# Altium PCB CZ100_Weld_V1.0.PcbDoc
Units mm, origin at the board's own origin, x right, y up, seen from the top; angles counter-clockwise.
Board outline 41.8 x 54 mm, 2 copper layers (Top Layer, Bottom Layer); 35 components, 22 nets, 86 pads, 0 vias.
Unrouted connection lines stored in the file: 58.
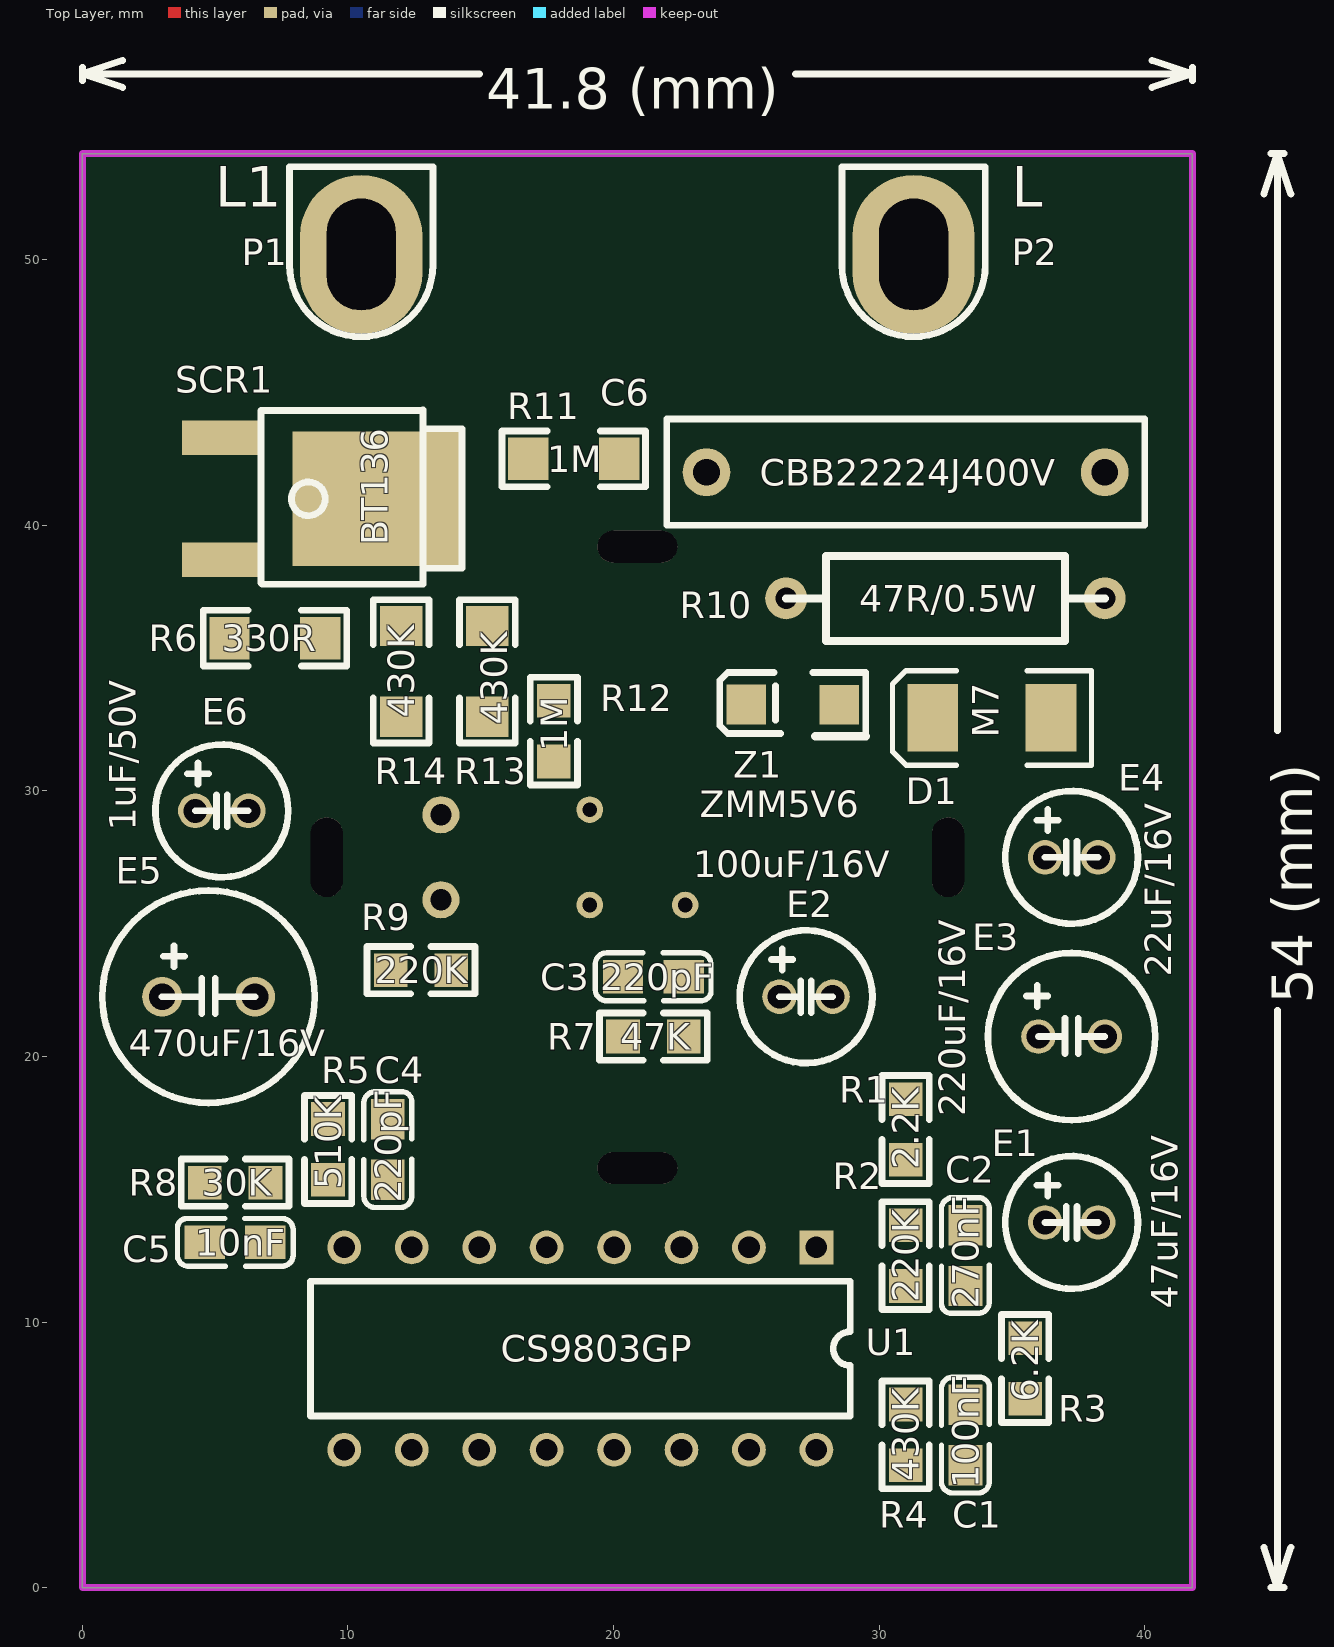
[diagram p0: Top Layer view]
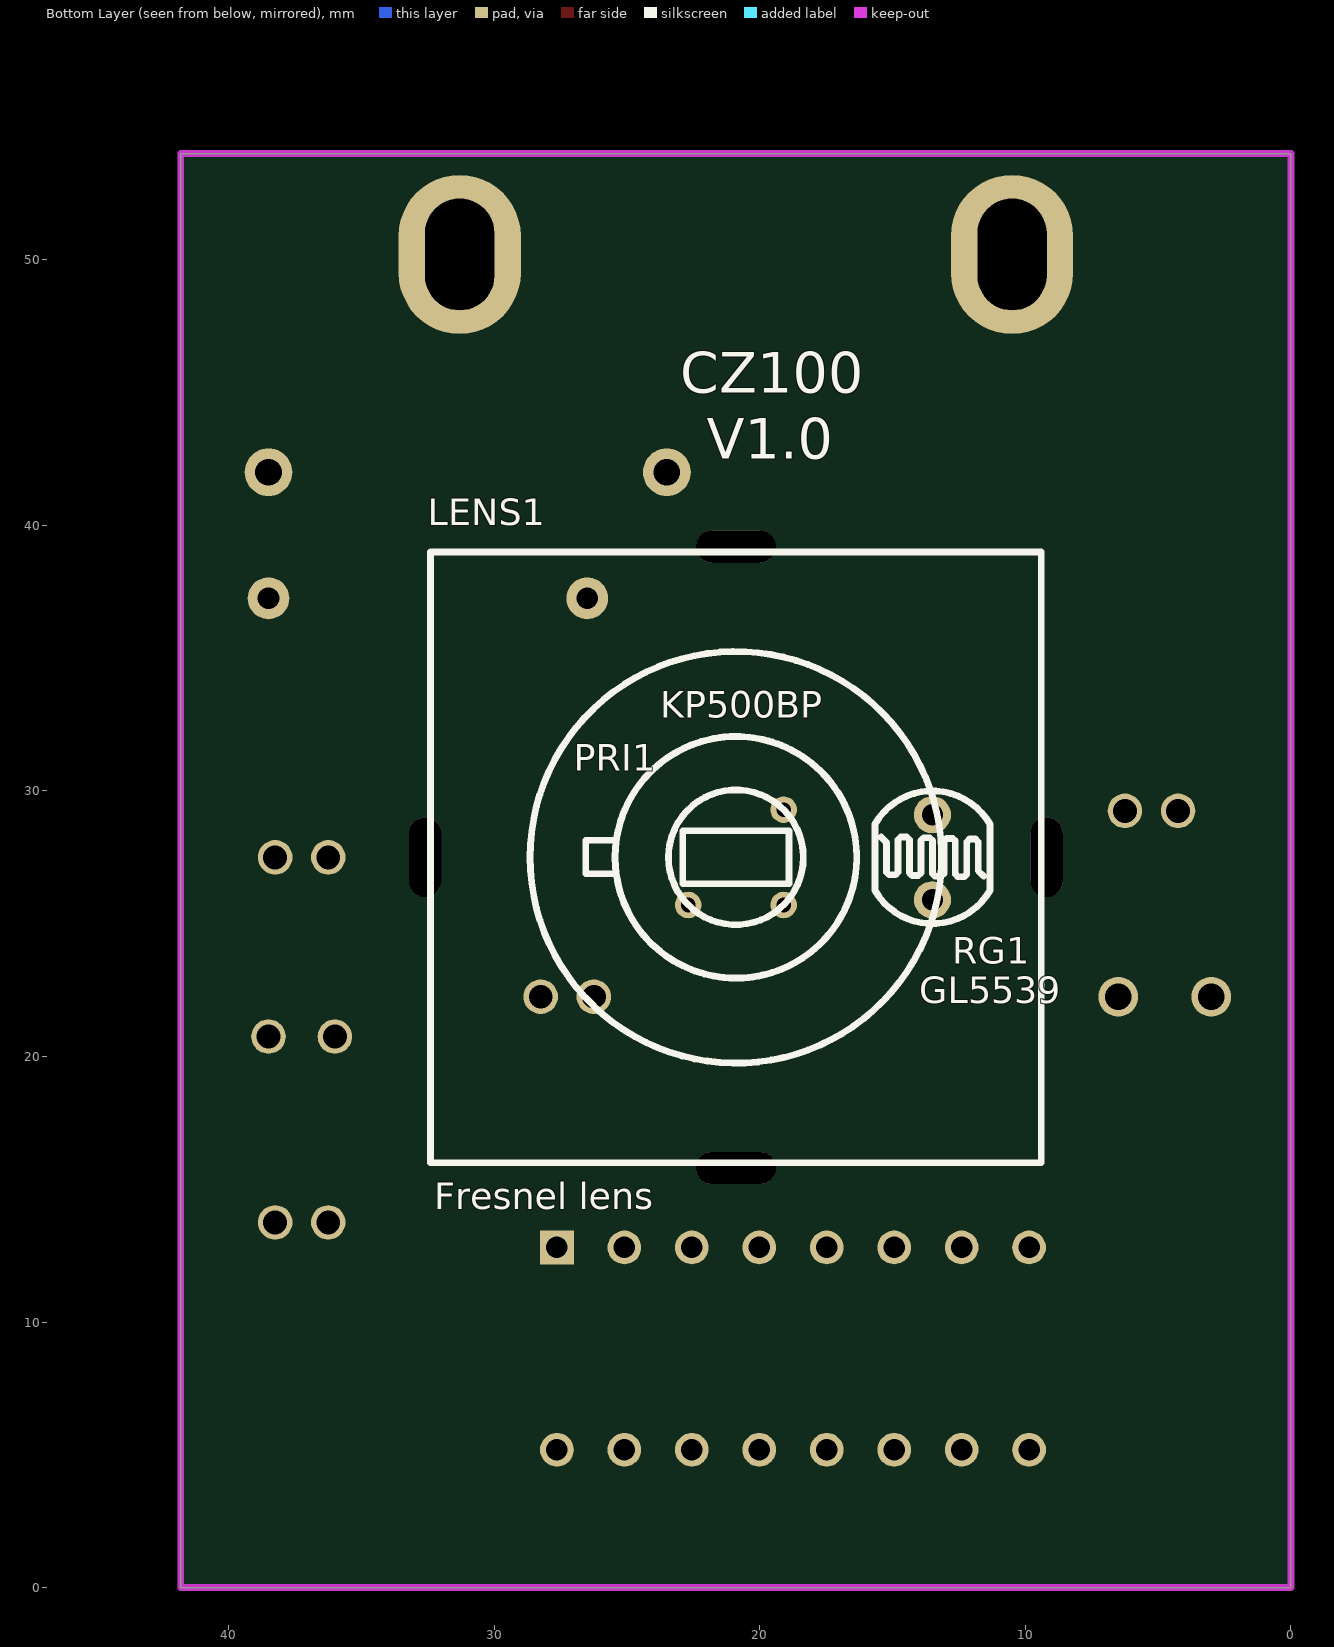
[diagram p1: Bottom Layer view, seen from below]

## Layer stack, top to bottom
Top Layer: signal copper 0.0356
Dielectric: dielectric 0.32, FR-4, Dk 4.8
Bottom Layer: signal copper 0.0356

## Board outline
0,0 0,54 41.8,54 41.8,0

## Design rules (kind name [scope] priority, off if disabled: settings)
Clearance "InPolygon to Keep-Out Layer" [InPolygon vs OnLayer('Keep-Out Layer')] p1: gap=1
Clearance "GND to +5V" [InNet('GND') vs InNet('+5V')] p2: gap=0.762
Clearance "NetE6_1 to GND" [InNet('NetE6_1') vs InNet('GND')] p3: gap=0.381
Clearance "NetR12_1 to GND" [InNet('NetR12_1') vs InNet('GND')] p4: gap=0.381
Clearance "GND to All" [InNet('GND')] p5: gap=0.508
Clearance [All] p6: gap=0.254
HoleSize [All] p1: absolutevalues=TRUE maxlimit=25.4 minlimit=0.025 maxpercent=80.000 minpercent=20.000
MinimumSolderMaskSliver [All] p1: minsoldermaskwidth=0
PlaneConnect [All] p1: planeconnectstyle=Direct reliefexpansion=0.508 reliefentries=4 reliefconductorwidth=0.254 reliefairgap=0.254
PolygonConnect [All] p1: connectstyle=Direct reliefconductorwidth=0.254 reliefentries=4 polygonreliefangle="90 Angle"
RoutingVias [All] p1: holewidth=0.711 width=1.27 viastyle="Through Hole" minholewidth=0.711 minwidth=1.27 maxholewidth=0.711 maxwidth=1.27
SilkToSilkClearance [All] p1: silktosilkclearance=0
SilkscreenOverComponentPads [All] p1: minsilkscreentomaskgap=0
SolderMaskExpansion [All] p1: expansion=0.102
Width [All] p1: maxlimit=25.4 minlimit=0.254 preferedwidth=0.254
23 further rules are at their usual default settings.

## Components (designator, comment, footprint, x,y, rotation, side; value= is the part's Value field where it differs from the comment)
C1 "100nF" 0805_C1 33.25,5.75 r90 top
C2 "270nF" 0805_C1 33.25,12.5 r270 top
C3 "220pF" 0805_C1 21.5,23 r0 top
C4 "220pF" 0805_C1 11.5,16.5 r90 top
C5 "10nF" 0805_C1 5.75,13 r180 top
C6 "CBB22224J400V" CBB22224J400V 31,42 r180 top
D1 "M7" DO-214AC(SMA) 34.25,32.75 r0 top
E1 "47uF/16V" CS_47uF/25V 37.25,13.75 r0 top
E2 "100uF/16V" CS_100uF/16V 27.25,22.25 r0 top
E3 "220uF/16V" CS_220uF/16V 37.25,20.75 r0 top
E4 "22uF/16V" CS_47uF/25V 37.25,27.5 r0 top
E5 "470uF/16V" CS_470uF/16V 4.75,22.25 r0 top
E6 "1uF/50V" CS_47uF/25V 5.25,29.25 r0 top
LENS1 "Fresnel lens" "Fresnel lens" 20.9,27.5 r180 bottom locked
P1 "L1" CP3M*8.8 10.5,53.5 r180 top locked
P2 "L" CP3M*8.8 31.3,53.5 r180 top locked
PRI1 "KP500BP" D203S 20.9,27.5 r315 bottom locked
R1 "2.2K" 0805_R 31,17.25 r270 top
R2 "220K" 0805_R 31,12.5 r90 top
R3 "6.2K" 0805_R 35.5,8.25 r90 top
R4 "430K" 0805_R 31,5.75 r270 top
R5 "510K" 0805_R 9.25,16.5 r90 top
R6 "330R" 1206_R 7.25,35.75 r180 top
R7 "47K" 0805_R 21.5,20.75 r180 top
R8 "30K" 0805_R 5.75,15.25 r180 top
R9 "220K" 0805_R 12.75,23.25 r180 top
R10 "47R/0.5W" RT50 32.5,37.25 r180 top
R11 "1M" 1206_R 18.5,42.5 r0 top
R12 "1M" 0805_R 17.75,32.25 r270 top
R13 "430K" 1206_R 15.25,34.5 r270 top
R14 "430K" 1206_R 12,34.5 r90 top
RG1 "GL5539" R5537 13.5,27.5 r270 bottom locked
SCR1 "BT136" TO-252 8.5,41 r270 top
U1 "CS9803GP" DIP-16 18.75,9 r270 top
Z1 "ZMM5V6" LL-34 26.75,33.25 r0 top

## Footprints (in the part's own frame and the unit in brackets; to place one, negate y for a bottom-side part, rotate by r counter-clockwise, add the part's x,y. Pads: shape width x height; smd on the part's side, far side on the other; paste and mask are expansions set on the pad)
0805_C1 [mil]
  rect 60x50 smd: 1(-45,0) 2(45,0)
  silkscreen extent -86,-35 85,35
0805_R [mil] "SMD Resistor"
  rect 50x50 smd: 1(-45,0) 2(45,0)
  silkscreen extent -80,-35 80,35
1206_R [mm] "SMD Resistor"
  rect 1.52x1.6 smd: 1(-1.71,0) 2(1.71,0)
  silkscreen extent -2.7,-1.05 2.7,1.05
CBB22224J400V [mm]
  round 1.8 hole 1: 1(-7.5,0) 2(7.5,0)
  silkscreen extent -9,-2 9,2
CP3M*8.8 [mm]
  oval 4.6x6 hole 2.6 slot 4.2 at 90 deg: 1(0,3.3)
  silkscreen extent -2.7,0 2.7,6.4
CS_47uF/25V [mm] "PTH  Electrolytic  Capacitor"
  round 1.3 hole 0.9: 1(-1,0) 2(1,0)
  silkscreen extent -2.5,-2.5 2.5,2.5
CS_100uF/16V [mm] "PTH  Electrolytic  Capacitor"
  round 1.3 hole 0.9: 1(-1,0) 2(1,0)
  silkscreen extent -2.5,-2.5 2.5,2.5
CS_220uF/16V [mm] "PTH  Electrolytic  Capacitor"
  round 1.3 hole 0.9: 1(-1.25,0) 2(1.25,0)
  silkscreen extent -3.15,-3.15 3.15,3.15
CS_470uF/16V [mm] "PTH  Electrolytic  Capacitor"
  round 1.5 hole 1: 1(-1.75,0) 2(1.75,0)
  silkscreen extent -4,-4 4,4
D203S [mm] "D203S, KP500BP"
  round 1 hole 0.55: 1(2.54,0) 2(0,2.54) 3(-2.54,0)
  silkscreen extent -4.55,-4.55 4.55,4.55
DIP-16 [mil]
  rect 50x50 hole 32: 1(-150,350)
  round 50 hole 32: 2(-150,250) 3(-150,150) 4(-150,50) 5(-150,-50) 6(-150,-150) 7(-150,-250) 8(-150,-350) 9(150,-350) 10(150,-250) 11(150,-150) 12(150,-50) 13(150,50) 14(150,150) 15(150,250) 16(150,350)
  silkscreen extent -100,-400 100,400
DO-214AC(SMA) [mil] "SMD Diode"
  rect 75x100 smd: A(87.5,0) K(-87.5,0)
  silkscreen extent -147,-70 148,70
"Fresnel lens" [mm]
  oval 1.2x3 hole 1.2 slot 3 at 90 deg unplated: 0(-11.7,0) 0(11.7,0)
  oval 3x1.2 hole 1.2 slot 3 at 0 deg unplated: 0(0,-11.7) 0(0,11.7)
  silkscreen extent -11.5,-11.5 11.5,11.5
LL-34 [mm] "SMD Diode"
  rect 1.5x1.5 smd: A(1.75,-0.008) K(-1.75,0.008)
  silkscreen extent -2.75,-1.19 2.75,1.21
R5537 [mm] "PTH Light dependent resistors"
  round 1.4 hole 0.8: 1(-1.6,0) 2(1.6,0)
  silkscreen extent -2.5,-2.17 2.5,2.17
RT50 [mil]
  round 62 hole 32: 1(-236.22,0) 2(236.22,0)
  silkscreen extent -236,-63 236,63
TO-252 [mm] "SMD IC"
  rect 1.3x3 smd: 1(-2.3,-3.245) 3(2.3,-3.245)
  rect 5.08x6.35 smd: 2(0,2.592)
  silkscreen extent -3.35,-1.78 3.22,5.79

## Part data
C1 C2 C3 C4 C5 C6: library part Cap1
D1: library part Diode-A, "SS14,SS24,SS34,M7"
E1 E2 E3 E4 E5 E6: library part "Cap Pol1"
P1 P2: library part "Header 1", "Header, 1-Pin"
PRI1: library part D203S, "D203S, KP500BP"
R1 R2 R3 R4 R5 R6 R7 R8 R9 R10 R11 R12 R13 R14: library part Res1
SCR1: library part TRIAC
Z1: library part Diode-B

## Nets (pads, with @x,y where several pads share a name; then routed paths per layer and width w, separated by ;. In a path a pad name is that pad's centre, name@x,y a point inside that pad or via, vN(x,y) a via of type N, cw(c..) or ccw(c..) an arc to the next point about the centre after c; other vN are vias at no path point)
+3.1V_VREF: E2.1 PRI1.1 U1.4
+5V: E5.1 P1.1 R5.2 R8.2 SCR1.1 U1.13 Z1.K
GND: C3.2 C4.2 C5.2 D1.A E2.2 E3.2 E4.2 E5.2 E6.2 PRI1.3 R7.1 R12.2 RG1.1 U1.5
NetC1_1: C1.1 R4.2 U1.16
NetC1_2: C1.2 R3.1 R4.1 U1.14
NetC2_1: C2.1 E1.2 R2.2 U1.1
NetC2_2: C2.2 R1.2 R2.1 U1.3
NetC3_1: C3.1 PRI1.2 R7.2 U1.2
NetC4_1: C4.1 R5.1 U1.6
NetC5_1: C5.1 R8.1 U1.8
NetC6_1: C6.1 P2.1 R11.1 R14.2 SCR1.2
NetC6_2: C6.2 R10.2 R11.2
NetD1_K: D1.K R10.1 Z1.A
NetE1_1: E1.1 R3.2
NetE3_1: E3.1 R1.1
NetE4_1: E4.1 U1.15
NetE6_1: E6.1 R9.2 U1.9
NetR6_1: R6.1 U1.10
NetR6_2: R6.2 SCR1.3
NetR9_1: R9.1 RG1.2
NetR12_1: R12.1 R13.2 U1.12
NetR13_1: R13.1 R14.1
pads on no net: LENS1.0 U1.7 U1.11

## Keep-outs
Keep-Out Layer:
  the board outline again, w0.254

## Silkscreen, mask and mechanical layers (free items; w line width, h text height)
Top Overlay:
  lines w0.254: 0,56.746 0,57.254 ; 1.524,56.492 0,57 ; 1.524,57.508 0,57 ; 14.95,57 0,57 ; 26.85,57 41.8,57 ; 40.276,56.492 41.8,57 ; 40.276,57.508 41.8,57 ; 41.8,56.746 41.8,57.254 ; 44.492,1.524 45,0 ; 44.492,52.476 45,54 ; 44.746,0 45.254,0 ; 44.746,54 45.254,54 ; 45,21.736 45,0 ; 45,32.264 45,54 ; 45.508,1.524 45,0 ; 45.508,52.476 45,54
  text "41.8 (mm)" at 15.204,55.687 h1.52
  text "L1" at 5,52 h1.52
  text "L" at 35,52 h1.52
  text "54 (mm)" at 46.313,21.99 h1.52 r90
Bottom Overlay:
  text "CZ100" at 23,45 h1.52
  text "V1.0" at 22,42.5 h1.52